# EAGLE board zeta2rework_lw_v32_rework (EAGLE 9.3.1)
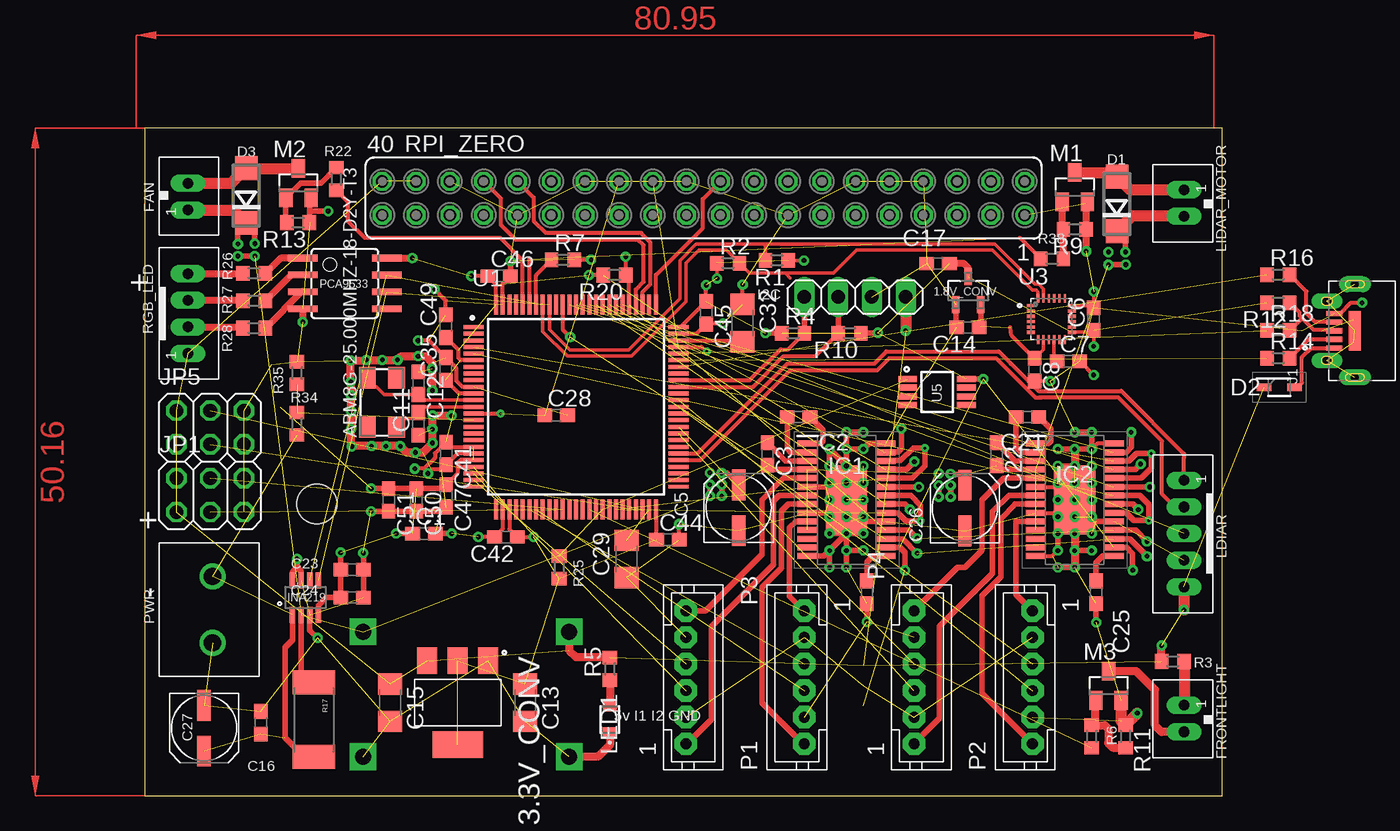
[diagram p0: board, top side]
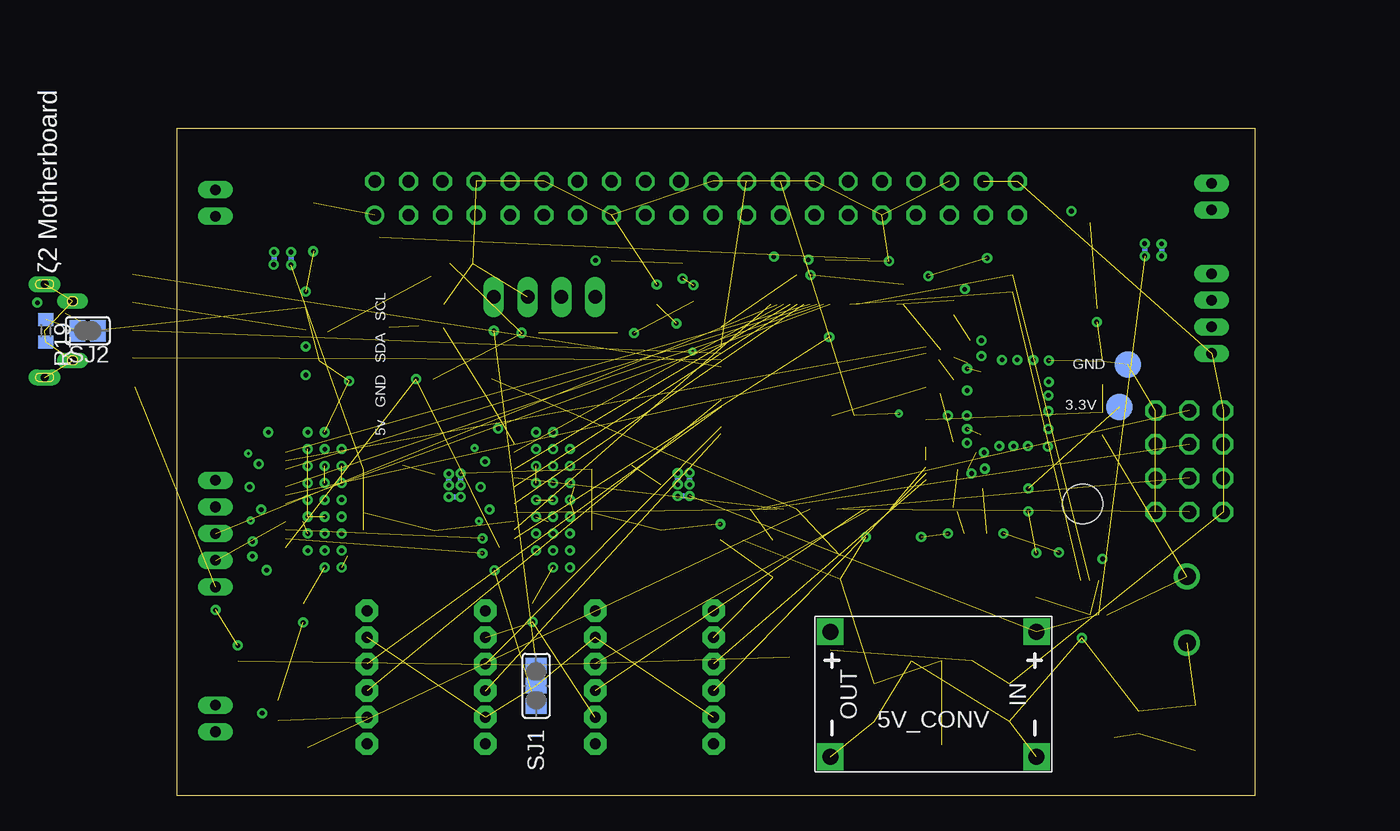
[diagram p1: board, bottom side, seen from below]

Size 80.95 x 50.16 mm. Coordinates in mm from the lower left corner, seen from the top.
Outline: 0,0 80.95,0 80.95,50.16 0,50.16 0,0
Copper layers (1+2*15+16): Top 0.035mm / dielectric 1.5mm / Route2 0.035mm / dielectric 0.15mm / Route15 0.035mm / dielectric 0.2mm / Bottom 0.035mm
Design rules "default *": minimum track width 6mil, minimum drill 0.35mm, track to track 6mil, track to pad 6mil, pad to pad 6mil, via to via 6mil, smd to smd 6mil, copper to edge 40mil, drill to drill 6mil, minimum pad ring 10mil, minimum via ring 8mil, stop-mask expansion 4mil, vias tented up to drill 0mil, thermal gap 10mil
Net classes: 0 default: clearance 0.203 mm
Holes 3 mm at 12.93,21.92

## Footprints (pad centres in the part's own frame; a part is rotated, then mirrored left to right if it is on the bottom)
SOT95P237X112-3N = smd 0.559 x 1.27: 1 -0.94,-1.041; 2 0.94,-1.041; 3 0,1.041
TP20R = smd 2 x 2: TP 0,0
SOT230P700X175-4N = smd 2 x 1.5: 1 -3.15,2.3; 2 -3.15,0; 3 -3.15,-2.3 | smd 2 x 3.8: 4 3.15,0
DC-DC-STEP-DOWN-MP2307 = drill 1.2 pad 2 square: IN+ -7.747,-4.699; IN- -7.747,4.699; OUT+ 7.747,-4.699; OUT- 7.747,4.699
5.0X3.2_KX-9A = smd 1.6 x 1.25: 1 -1.85,-1.1; 2 1.85,-1.1; 3 1.85,1.1; 4 -1.85,1.1
C0603 = smd 1.1 x 1: 1 -0.85,0; 2 0.85,0
UD-5X5,8_NICHICON = smd 2.3 x 1: + 1.725,0; - -1.7,0
C1206 = smd 1.6 x 1.8: 1 -1.4,0; 2 1.4,0
DO214AC = smd 1.8 x 1.7: A 2.05,0; C -2.05,0
SOD2513X117N = smd 1.085 x 0.55: 1 -1.14,0; 2 1.14,0
JST_B2B-PH_HEADER = drill 0.8 long: P1 1.075,0.048; P2 -0.925,0.048
1X04 = drill 1.016 long: 1 -3.81,0; 2 -1.27,0; 3 1.27,0; 4 3.81,0
SOP65P640X120-29N = smd 1.475 x 0.45: 1 -2.938,4.225; 2 -2.938,3.575; 3 -2.938,2.925; 4 -2.938,2.275; 5 -2.938,1.625; 6 -2.938,0.975; 7 -2.938,0.325; 8 -2.938,-0.325; 9 -2.938,-0.975; 10 -2.938,-1.625; 11 -2.938,-2.275; 12 -2.938,-2.925; 13 -2.938,-3.575; 14 -2.938,-4.225; 15 2.938,-4.225; 16 2.938,-3.575; 17 2.938,-2.925; 18 2.938,-2.275; 19 2.938,-1.625; 20 2.938,-0.975; 21 2.938,-0.325; 22 2.938,0.325; 23 2.938,0.975; 24 2.938,1.625; 25 2.938,2.275; 26 2.938,2.925; 27 2.938,3.575; 28 2.938,4.225 | smd 3.1 x 5.18: 29 0,0
SOT23-8 = smd 0.4 x 1.2: 1 -0.975,-1.3; 2 -0.325,-1.3; 3 0.325,-1.3; 4 0.975,-1.3; 5 0.975,1.3; 6 0.325,1.3; 7 -0.325,1.3; 8 -0.975,1.3
CUI_UJ2-MIBH2-4-SMT-TR = smd 0.4 x 1.2: 1 -1.3,2.1; 2 -0.65,2.1; 3 0,2.1; 4 0.65,2.1; 5 1.3,2.1 | drill 0.6 pad 1.2 long: SH1 -3.5,0.55; SH4 3.5,0.55 | drill 0.65 pad 1.1 long: SH2 -2.225,2.65; SH3 2.225,2.65 | smd 3 x 0.9: SH5 0,0.55
2X03 = drill 1.016 octagon: 1 -2.54,-1.27; 2 -2.54,1.27; 3 0,-1.27; 4 0,1.27; 5 2.54,-1.27; 6 2.54,1.27
JST_B5B-PH_HEADER = drill 0.8 long: P1 4,0.048; P2 2,0.048; P3 0,0.048; P4 -2,0.048; P5 -4,0.048
LTM673-N1R2-25 = smd 0.8 x 1: 1 -1,0; 2 1,0
SOT23 = smd 1 x 1.4: 1 -0.95,-1.1; 2 0.95,-1.1; 3 0,1.1
JST-PH6 = drill 0.813 pad 1.676 octagon: 1 5,0; 2 3,0; 3 1,0; 4 -1,0; 5 -3,0; 6 -5,0
SOIC8 = smd 0.5 x 2.2: 1 -1.905,-3.154; 2 -0.645,-3.154; 3 0.625,-3.154; 4 1.895,-3.154; 5 1.905,3.154; 6 0.635,3.154; 7 -0.635,3.154; 8 -1.905,3.154
691137710002 = drill 1.3: 1 -2.5,0; 2 2.5,0
R0603 = smd 1 x 1.1: 1 -0.85,0; 2 0.85,0
2512 = smd 1.8 x 3.2: 1 -2.8,0; 2 2.8,0
JST_B4B-PH_HEADER = drill 0.8 long: P1 2.98,0.048; P2 0.98,0.048; P3 -1.02,0.048; P4 -3.02,0.048
FE20-2 = drill 0.914: 1 -24.13,1.27 | drill 0.914 octagon: 2 -24.13,-1.27; 3 -21.59,1.27; 4 -21.59,-1.27; 5 -19.05,1.27; 6 -19.05,-1.27; 7 -16.51,1.27; 8 -16.51,-1.27; 9 -13.97,1.27; 10 -13.97,-1.27; 11 -11.43,1.27; 12 -11.43,-1.27; 13 -8.89,1.27; 14 -8.89,-1.27; 15 -6.35,1.27; 16 -6.35,-1.27; 17 -3.81,1.27; 18 -3.81,-1.27; 19 -1.27,1.27; 20 -1.27,-1.27; 21 1.27,1.27; 22 1.27,-1.27; 23 3.81,1.27; 24 3.81,-1.27; 25 6.35,1.27; 26 6.35,-1.27; 27 8.89,1.27; 28 8.89,-1.27; 29 11.43,1.27; 30 11.43,-1.27; 31 13.97,1.27; 32 13.97,-1.27; 33 16.51,1.27; 34 16.51,-1.27; 35 19.05,1.27; 36 19.05,-1.27; 37 21.59,1.27; 38 21.59,-1.27; 39 24.13,1.27; 40 24.13,-1.27
SJ_2 = smd 1.168 x 1.6: 1 -1.524,0; 2 0,0; 3 1.524,0
SJ = smd 1.168 x 1.6: 1 -0.762,0; 2 0.762,0
QFP50P1600X1600X160-100N = smd 1.5 x 0.3: 1 -7.7,6; 2 -7.7,5.5; 3 -7.7,5; 4 -7.7,4.5; 5 -7.7,4; 6 -7.7,3.5; 7 -7.7,3; 8 -7.7,2.5; 9 -7.7,2; 10 -7.7,1.5; 11 -7.7,1; 12 -7.7,0.5; 13 -7.7,0; 14 -7.7,-0.5; 15 -7.7,-1; 16 -7.7,-1.5; 17 -7.7,-2; 18 -7.7,-2.5; 19 -7.7,-3; 20 -7.7,-3.5; 21 -7.7,-4; 22 -7.7,-4.5; 23 -7.7,-5; 24 -7.7,-5.5; 25 -7.7,-6; 51 7.7,-6; 52 7.7,-5.5; 53 7.7,-5; 54 7.7,-4.5; 55 7.7,-4; 56 7.7,-3.5; 57 7.7,-3; 58 7.7,-2.5; 59 7.7,-2; 60 7.7,-1.5; 61 7.7,-1; 62 7.7,-0.5; 63 7.7,0; 64 7.7,0.5; 65 7.7,1; 66 7.7,1.5; 67 7.7,2; 68 7.7,2.5; 69 7.7,3; 70 7.7,3.5; 71 7.7,4; 72 7.7,4.5; 73 7.7,5; 74 7.7,5.5; 75 7.7,6 | smd 0.3 x 1.5: 26 -6,-7.7; 27 -5.5,-7.7; 28 -5,-7.7; 29 -4.5,-7.7; 30 -4,-7.7; 31 -3.5,-7.7; 32 -3,-7.7; 33 -2.5,-7.7; 34 -2,-7.7; 35 -1.5,-7.7; 36 -1,-7.7; 37 -0.5,-7.7; 38 0,-7.7; 39 0.5,-7.7; 40 1,-7.7; 41 1.5,-7.7; 42 2,-7.7; 43 2.5,-7.7; 44 3,-7.7; 45 3.5,-7.7; 46 4,-7.7; 47 4.5,-7.7; 48 5,-7.7; 49 5.5,-7.7; 50 6,-7.7; 76 6,7.7; 77 5.5,7.7; 78 5,7.7; 79 4.5,7.7; 80 4,7.7; 81 3.5,7.7; 82 3,7.7; 83 2.5,7.7; 84 2,7.7; 85 1.5,7.7; 86 1,7.7; 87 0.5,7.7; 88 0,7.7; 89 -0.5,7.7; 90 -1,7.7; 91 -1.5,7.7; 92 -2,7.7; 93 -2.5,7.7; 94 -3,7.7; 95 -3.5,7.7; 96 -4,7.7; 97 -4.5,7.7; 98 -5,7.7; 99 -5.5,7.7; 100 -6,7.7
QFN40P300X300X105-25N = smd 0.64 x 0.22: 1 -1.545,1; 2 -1.545,0.6; 3 -1.545,0.2; 4 -1.545,-0.2; 5 -1.545,-0.6; 6 -1.545,-1; 13 1.545,-1; 14 1.545,-0.6; 15 1.545,-0.2; 16 1.545,0.2; 17 1.545,0.6; 18 1.545,1 | smd 0.22 x 0.64: 7 -1,-1.545; 8 -0.6,-1.545; 9 -0.2,-1.545; 10 0.2,-1.545; 11 0.6,-1.545; 12 1,-1.545; 19 1,1.545; 20 0.6,1.545; 21 0.2,1.545; 22 -0.2,1.545; 23 -0.6,1.545; 24 -1,1.545
SOP65P490X95-8N = smd 1.4 x 0.45: 1 -2.2,0.975; 2 -2.2,0.325; 3 -2.2,-0.325; 4 -2.2,-0.975; 5 2.2,-0.975; 6 2.2,-0.325; 7 2.2,0.325; 8 2.2,0.975

## Placement (x,y rotation side)
1.8V_CONV  MCP1700T-1802E/TT  [SOT95P237X112-3N]  61.85,37.95 0 top
3.3V  TPSQTP20R  [TP20R]  10.16,29.21 0 bottom
3.3V_CONV  NCP1117LPST33T3G  [SOT230P700X175-4N]  23.5,6.99 270 top
5V_CONV  DC-DC-STEP-DOWN-MP2307  [DC-DC-STEP-DOWN-MP2307]  24.13,7.62 180 bottom
ABM8G-25.000MHZ-18-D2Y-T3  25mhz  [5.0X3.2_KX-9A]  17.81,29.54 90 top
C1  4.7µf  [C0603]  20.95,19.69 0 top
C2  0.01µf 100v  [C0603]  49.11,28.45 180 top
C3  0.1µF 16v  [C0603]  46.76,25.67 270 top
C4  0.47µF 6.3v  [C0603]  54.23,15.28 270 top
C5  47µF  [UD-5X5,8_NICHICON]  44.6,21.62 90 top
C6  0.1nF  [C0603]  71.27,35.81 90 top
C7  0.1nF  [C0603]  69.37,32.64 0 top
C8  0.1nF  [C0603]  66.83,32 270 top
C11  Xpf  [C0603]  20.55,27.94 90 top
C12  Xpf  [C0603]  20.55,30.99 270 top
C13  10µF  [C1206]  28.57,6.99 270 top
C14  1µF  [C0603]  61.82,35.18 180 top
C15  10µF  [C1206]  18.41,6.99 270 top
C16  0.1µF  [C0603]  8.71,5.49 90 top
C17  1µF  [C0603]  59.59,39.98 180 top
C21  0.01µf 100v  [C0603]  66.29,28.45 180 top
C22  0.1µF 16v  [C0603]  63.98,25.65 270 top
C23  100nf  [C0603]  15.57,16.97 0 top
C24  0.1µF  [C0603]  15.57,14.88 0 top
C25  0.47µF 6.3v  [C0603]  71.45,15.28 270 top
C26  47µF  [UD-5X5,8_NICHICON]  61.59,21.59 90 top
C27  100µF  [UD-5X5,8_NICHICON]  4.45,5.08 270 top
C28  100nF  [C0603]  30.9,28.58 0 top
C29  2.2µf Low ESR < 2ohm  [C1206]  36.2,17.78 90 top
C32  2.2µf Low ESR < 2ohm  [C1206]  44.91,35.51 270 top
C35  100nF  [C0603]  22.61,32.07 90 top
C41  100nF  [C0603]  22.63,25.7 270 top
C42  100nF  [C0603]  27.11,19.43 180 top
C44  100nF  [C0603]  39.28,19.23 0 top
C45  100nF  [C0603]  42.16,36.28 270 top
C46  100nF  [C0603]  26.61,39.04 0 top
C47  100nF  [C0603]  22.63,22.52 270 top
C49  100nF  [C0603]  22.61,35.27 90 top
C50  100nF  [C0603]  20.4,22.21 270 top
C51  1µf  [C0603]  18.31,22.21 270 top
D1  1N4004 SMD  [DO214AC]  73.03,44.45 90 top
D2  BAT60JFILM  [SOD2513X117N]  85.22,30.68 0 top  (outside the outline)
D3  1N4004 SMD  [DO214AC]  7.62,45.09 90 top
FAN  JST-PH_2-PIN_HEADER  [JST_B2B-PH_HEADER]  3.17,45.09 270 top
FRONTLIGHT  JST-PH_2-PIN_HEADER  [JST_B2B-PH_HEADER]  78.11,5.71 90 top
GND  TPSQTP20R  [TP20R]  9.53,32.38 0 bottom
I2C  [1X04]  53.34,37.47 0 top
IC1  DRV8844PWPR  [SOP65P640X120-29N]  52.7,22.23 0 top
IC2  DRV8844PWPR  [SOP65P640X120-29N]  69.85,22.23 0 top
INA219  INA219  [SOT23-8]  12.06,14.88 0 top
J1  UJ2-MIBH2-4-SMT-TR  [CUI_UJ2-MIBH2-4-SMT-TR]  91.44,34.92 90 top  (outside the outline)
JP1  [2X03]  4.9,22.58 0 top
JP5  [2X03]  4.9,27.66 0 top
LDIAR  JST-PH_5-PIN_HEADER  [JST_B5B-PH_HEADER]  78.11,19.69 90 top
LED1  LT M673  [LTM673-N1R2-25]  34.92,5.71 90 top
LIDAR_MOTOR  JST-PH_2-PIN_HEADER  [JST_B2B-PH_HEADER]  78.11,44.45 90 top
M1  IRLML2502  [SOT23]  69.85,45.72 0 top
M2  IRLML2502  [SOT23]  11.53,46.02 0 top
M3  IRLML2502  [SOT23]  72.39,8.25 0 top
P1  [JST-PH6]  49.53,8.89 90 top
P2  [JST-PH6]  66.67,8.89 90 top
P3  [JST-PH6]  40.64,8.89 270 top
P4  [JST-PH6]  57.78,8.89 270 top
PCA9533  PCA9533  [SOIC8]  15.01,38.48 270 top
PWR  691137710002  [691137710002]  5.08,13.97 270 top
R1  10k  [R0603]  47.47,40.21 180 top
R2  10k  [R0603]  43.81,40.01 0 top
R3  0R  [R0603]  77.22,10.08 0 top
R4  10k  [R0603]  48.69,34.75 0 top
R5  220R  [R0603]  34.92,9.53 90 top
R6  22R  [R0603]  71.12,4.44 90 top
R7  10k  [R0603]  31.39,40.26 0 top
R9  100k  [R0603]  69.85,42.55 180 top
R10  10k  [R0603]  52.93,34.75 180 top
R11  100k  [R0603]  73.66,4.44 270 top
R12  1k5  [R0603]  85.14,37.03 180 top  (outside the outline)
R13  100k  [R0603]  11.51,43.05 180 top
R14  22r  [R0603]  85.14,32.87 0 top  (outside the outline)
R16  100k  [R0603]  85.14,39.14 0 top  (outside the outline)
R17  0.1/1% (PT2512FK-070R1L)  [2512]  12.7,5.71 270 top
R18  22r  [R0603]  85.14,34.95 0 top  (outside the outline)
R19  100r  [R0603]  90.81,34.92 270 bottom  (outside the outline)
R20  100k  [R0603]  35.28,39.12 180 top
R22  22R  [R0603]  14.38,46.33 90 top
R25  4k7  [R0603]  31.11,17.14 270 top
R26  220R  [R0603]  8.2,39.24 180 top
R27  220R  [R0603]  8.2,37.19 180 top
R28  220R  [R0603]  8.2,35.13 180 top
R34  100k  [R0603]  11.43,27.94 270 top
R35  69k  [R0603]  11.43,31.75 270 top
R38  22R  [R0603]  68.15,40.34 0 top
RGB_LED  JST-PH_4-PIN_HEADER  [JST_B4B-PH_HEADER]  3.17,36.2 270 top
RPI_ZERO  [FE20-2]  41.96,44.88 180 top
SJ1  [SJ_2]  53.98,8.25 270 bottom
SJ2  [SJ]  87.66,34.92 180 bottom  (outside the outline)
U1  STM32F427VI  [QFP50P1600X1600X160-100N]  32.38,29.21 0 top
U3  ICM-20948  [QFN40P300X300X105-25N]  68.1,35.81 0 top
U5  DS18B20U+  [SOP65P490X95-8N]  59.51,30.33 0 top

## Library data of the parts
1.8V_CONV = MCP1700T-2102E_TT; AVAILABILITY: Unavailable; DESCRIPTION: 250mA CMOS LDO, Isupply 1uA and 2% VoutAccuracy; MF: Microchip; MP: MCP1700T-2102E/TT; PACKAGE: SOT-23 Microchip; PRICE: None
3.3V GND = testpad
3.3V_CONV = NCP1117LPST33T3G; AVAILABILITY: Unavailable; DESCRIPTION: Linear Voltage Regulator, Positive, LDO, 1.0 A _Fixed and Adjustable_ Vout: 3.3 V; MF: ON Semiconductor; MP: NCP1117LPST33T3G; PACKAGE: SOT-223 ON Semiconductor; PRICE: None
5V_CONV = diy-modules
ABM8G-25.000MHZ-18-D2Y-T3 = crystal-geyer_V1_0
C1-C8 C11-C17 C21-C29 C32 C35 C41 C42 C44-C47 C49-C51 = rcl; SPICEPREFIX: C
D1 D3 = diode
D2 = BAT60JFILM; ALLIED_NUMBER: 70389806; ALLIED_PRICE-STOCK: http://www.alliedelec.com/stmicroelectronics-bat60jfilm/70389806/; DESCRIPTION: BAT60JFILM, Schottky Diode, 3A max, 10V, 2-Pin, SOD-323; HEIGHT: 1.17mm; MANUFACTURER_NAME: STMicroelectronics; MANUFACTURER_PART_NUMBER: BAT60JFILM; MOUSER_PART_NUMBER: 511-BAT60JFILM; MOUSER_PRICE-STOCK: https://www.mouser.com/Search/Refine.aspx?Keyword=511-BAT60JFILM; RS_PART_NUMBER: 1458781; RS_PRICE-STOCK: http://uk.rs-online.com/web/p/products/1458781
FAN FRONTLIGHT LDIAR LIDAR_MOTOR RGB_LED = srg
I2C JP1 JP5 = pinhead
IC1 IC2 = DRV8844PWPR; DESCRIPTION: 5A Brushed DC motor or Quad 1.75A Solenoid/Relay Driver with +/-30V split supply support (PWM Ctrl); HEIGHT: 1.2mm; MANUFACTURER_NAME: Texas Instruments; MANUFACTURER_PART_NUMBER: DRV8844PWPR; MOUSER_PART_NUMBER: 595-DRV8844PWPR; MOUSER_PRICE-STOCK: https://www.mouser.com/Search/Refine.aspx?Keyword=595-DRV8844PWPR
INA219 = INA219; AVAILABILITY: Unavailable; DESCRIPTION: the ina219 is a high-side current shunt and power monitor with an i2c interface. the ina219 monitors both shunt drop ...; MF: Texas Instruments; MP: INA219; PACKAGE: None; PRICE: None
J1 = UJ2-MIBH2-4-SMT-TR; AVAILABILITY: Unavailable; CUI_PURCHASE_URL: https://www.cui.com/product/interconnect/usb-connectors/micro-b/uj2-mibh2-4-smt?utm_source=snapeda.com&utm_medium=referral&utm_campaign=snapedaBOM; DESCRIPTION: Micro B Type 5 Pin Horizontal 30 µin Plating SMT USB Jack 2.0; MF: CUI Inc.; MP: UJ2-MIBH2-4-SMT-TR; PACKAGE: None; PRICE: None
LED1 = LT_M673-N1R2-25; DESCRIPTION: Osram Opto LT M673-N1R2-25, Mini TOPLED Series Green LED, 529 nm,, Rectangle Lens SMD Package; HEIGHT: mm; MANUFACTURER_NAME: OSRAM Opto Semiconductors; MANUFACTURER_PART_NUMBER: LT M673-N1R2-25; MOUSER_PART_NUMBER: 720-LTM673N1R225Z; MOUSER_PRICE-STOCK: https://www.mouser.com/Search/Refine.aspx?Keyword=720-LTM673N1R225Z; RS_PART_NUMBER: 9133231; RS_PRICE-STOCK: http://uk.rs-online.com/web/p/products/9133231
M1-M3 = IRLML2502TRPBF; AVAILABILITY: Unavailable; DESCRIPTION: Single N-Channel 20 V 0.08 Ohm 12 nC 1.25 W Silicon SMT Mosfet - SOT-23; MF: Infineon; MP: IRLML2502TRPBF; PACKAGE: SOT-23-3 Infineon; PRICE: None
P1-P4 = jst-ph
PCA9533 = adam - ics
PWR = term block; AVAILABILITY: Unavailable; DESCRIPTION: Term Block 2pos Side Entry 5mm; MF: Wurth Electronics; MP: 691137710002; PACKAGE: None; PRICE: None
R1-R7 R9-R14 R16 R18-R20 R22 R25-R28 R34 R35 R38 = rcl; SPICEPREFIX: R
R17 = microbuilder
RPI_ZERO = con-lsta; OC_FARNELL: unknown; OC_NEWARK: unknown
SJ1 SJ2 = jumper
U1 = STM32F427VGT7; AVAILABILITY: Unavailable; DESCRIPTION: Ic Mcu 32bit 1mb Flash 100lqfp; MF: STMicroelectronics; MP: STM32F427VGT7; PACKAGE: LQFP-100 STMicroelectronics; PRICE: None
U3 = ICM-20948; AVAILABILITY: Unavailable; DESCRIPTION: 9 Axis=3 Axis Gyro+3 Axis Accel+Compass. Pin For Pin With m; MF: TDK InvenSense; MP: ICM-20948; PACKAGE: QFN-24 InvenSense; PRICE: None
U5 = DS18B20U_; AVAILABILITY: Unavailable; DESCRIPTION: Date Code: 1043+; RoHS Compliant: Yes;; MF: Maxim; MP: DS18B20U+; PACKAGE: TSSOP-8 Chip Coolers; PRICE: None

## Nets
+1.8V: 1.8V_CONV.2 C8.1 C14.1 U3.8
+3V3: 1.8V_CONV.3 3.3V.TP 3.3V_CONV.2 3.3V_CONV.4 C1.1 C6.1 C13.1 C17.1 C23.1 C24.1 C35.1 C41.1 C42.1 C44.1 C45.1 C46.1 C47.1 C49.1 C50.1 C51.1 IC1.16 IC2.16 INA219.4 PCA9533.8 R1.1 R2.1 R4.1 R10.1 R12.2 R20.2 R25.2 SJ1.3 U1.6 U1.11 U1.19 U1.21 U1.22 U1.28 U1.50 U1.75 U1.100 U3.13 U5.8
+5V: 3.3V_CONV.3 5V_CONV.OUT+ C15.1 D2.1 I2C.4 JP1.1 JP1.2 JP5.1 JP5.2 LDIAR.P5 R3.1 R5.2 RGB_LED.P1 RPI_ZERO.38 RPI_ZERO.40 SJ1.1
+8V: 5V_CONV.IN+ C3.2 C5.+ C22.2 C26.+ D1.C D3.C FAN.P1 IC1.4 IC1.11 IC2.4 IC2.11 INA219.2 LIDAR_MOTOR.P2 R17.1
BAT_LVL: R34.1 R35.2 U1.15
DEC_LB_1: P1.3 U1.31
DEC_LB_2: P1.4 U1.32
DEC_LF_1: P3.3 U1.23
DEC_LF_2: P3.4 U1.24
DEC_RB_1: P2.3 U1.63
DEC_RB_2: P2.4 U1.64
DEC_RF_1: P4.3 U1.59
DEC_RF_2: P4.4 U1.60
GND: 1.8V_CONV.1 3.3V_CONV.1 5V_CONV.IN- 5V_CONV.OUT- C1.2 C4.2 C5.- C6.2 C7.2 C8.2 C11.1 C12.1 C13.2 C14.2 C15.2 C16.2 C17.2 C23.2 C24.2 C25.2 C26.- C27.- C28.2 C29.1 C32.1 C35.2 C41.2 C42.2 C44.2 C45.2 C46.2 C47.2 C49.2 C50.2 C51.2 GND.TP I2C.3 IC1.6 IC1.9 IC1.14 IC1.19 IC1.28 IC1.29 IC2.6 IC2.9 IC2.14 IC2.19 IC2.28 IC2.29 INA219.3 INA219.7 INA219.8 J1.5 JP1.5 JP1.6 JP5.5 JP5.6 LDIAR.P4 LED1.1 M1.2 M2.2 M3.2 P1.5 P2.5 P3.5 P4.5 PCA9533.4 PWR.2 R7.2 R9.1 R11.1 R13.1 R35.1 RPI_ZERO.1 RPI_ZERO.8 RPI_ZERO.12 RPI_ZERO.15 RPI_ZERO.22 RPI_ZERO.28 RPI_ZERO.31 RPI_ZERO.36 SJ2.1 U1.10 U1.20 U1.27 U1.74 U1.99 U3.18 U5.4
I2C1_SCL: INA219.5 PCA9533.6 R1.2 U1.92 U3.23
I2C1_SDA: INA219.6 PCA9533.7 R2.2 U1.93 U3.24
I2C3_SCL: I2C.1 R4.2 U1.67
I2C3_SDA: I2C.2 R10.2 U1.66
LIDAR_POS_INT: LDIAR.P3 U1.81
M_LB_IN1: IC1.23 U1.84
M_LB_IN2: IC1.21 U1.85
M_LF_IN1: IC1.27 U1.82
M_LF_IN2: IC1.25 U1.83
M_PWM_LB: IC1.20 IC1.22 U1.45
M_PWM_LF: IC1.24 IC1.26 U1.44
M_PWM_RB: IC2.20 IC2.22 U1.5
M_PWM_RF: IC2.24 IC2.26 U1.4
M_RB_IN1: IC2.23 U1.88
M_RB_IN2: IC2.21 U1.89
M_RF_IN1: IC2.27 U1.86
M_RF_IN2: IC2.25 U1.87
M_SLEEP: IC1.17 IC2.17 U1.90
N$1: C21.2 IC2.2
N$2: C21.1 IC2.1
N$3: C22.1 IC2.3
N$4: IC2.10 P2.1
N$5: J1.3 R12.1 R18.2
N$6: FRONTLIGHT.P1 R3.2
N$7: LED1.2 R5.1
N$8: C7.1 U3.10
N$9: FRONTLIGHT.P2 M3.3
N$10: M3.1 R6.2 R11.2
N$11: IC2.5 P4.6
N$12: IC2.7 P4.1
N$13: ABM8G-25.000MHZ-18-D2Y-T3.1 C11.2 U1.13
N$14: IC1.5 P3.6
N$15: D2.2 J1.1
N$16: R7.1 U1.94
N$17: J1.4 R16.2
N$18: C2.2 IC1.2
N$19: IC2.8 P2.6
N$20: C2.1 IC1.1
N$21: C3.1 IC1.3
N$22: PCA9533.1 R26.1
N$23: PCA9533.2 R27.1
N$24: PCA9533.3 R28.1
N$25: R19.1 SJ2.2
N$26: C25.1 IC2.15
N$27: IC1.7 P3.1
N$28: IC1.8 P1.6
N$29: C4.1 IC1.15
N$30: IC1.10 P1.1
N$31: R26.2 RGB_LED.P4
N$32: P1.2 P2.2 P3.2 P4.2 SJ1.2
N$33: R27.2 RGB_LED.P3
N$34: J1.2 R14.2
N$35: R28.2 RGB_LED.P2
N$36: C29.2 U1.49
N$37: M2.1 R13.2 R22.2
N$38: M1.1 R9.2 R38.2
N$39: D1.A LIDAR_MOTOR.P1 M1.3
N$40: J1.SH1 J1.SH2 J1.SH3 J1.SH4 J1.SH5 R19.2
N$44: ABM8G-25.000MHZ-18-D2Y-T3.3 C12.2 U1.12
N$45: C32.2 U1.73
N$55: D3.A FAN.P2 M2.3
NFAULT: IC1.18 IC2.18 R20.1 U1.80
NRST: C28.1 RPI_ZERO.26 U1.14
PWM1: JP5.3 U1.47
PWM2: JP5.4 U1.48
PWM3: JP1.3 U1.35
PWM4: JP1.4 U1.36
PWM_FAN: R22.1 U1.96
PWM_LIDAR: R38.1 U1.95
PWM_LIGHT: R6.1 U1.40
SWCLK: RPI_ZERO.20 U1.76
SWDIO: RPI_ZERO.24 U1.72
TEMPERATURE: R25.1 U1.42 U5.1
UART2_RX: U1.26
UART2_TX: U1.25
UART3_RX: LDIAR.P1 U1.56
UART3_TX: LDIAR.P2 U1.55
UART4_RX: RPI_ZERO.34 U1.79
UART4_TX: RPI_ZERO.32 U1.78
USB_OTG_DM: R14.1 U1.70
USB_OTG_DP: R18.1 U1.71
USB_OTG_ID: R16.1 U1.69
USB_OTG_VBUS: U1.68
V+: C16.1 C27.+ INA219.1 PWR.1 R17.2 R34.2

## Tracks (layer width: path | path; a pad name or v marks a point on that pad's centre or on a via)
+1.8V  (1 unrouted)
  Top 0.254: C8.1 67.5,33.52 U3.8
  Top 0.305: C8.1 65.1,34.58 65,35.17
  Top 0.406: 1.8V_CONV.2 62.79,35.29 C14.1
+3V3  (via drill 0.35)  (27 unrouted)
  Top 0.254: U3.13 71.12,34.81 C6.1 v71.27,33.76 | R1.1 v49.51,40.21 | v42.98,38.86 42.97,38.87 R2.1
  Top 0.305: U1.28 27.39,20.01 C42.1 v29.21,19.43 | U1.50 38.38,19.41 C44.1 | U1.75 40.24,35.21 C45.1 v42.16,38.35 | U1.100 26.39,38.41 C46.1 v24.51,39.04 | U1.11 23.61,30.21 C35.1 | C41.1 22.54,26.55 | C41.1 22.98,26.21 U1.19 | U1.21 23.69,25.21 23.52,25.04 23.52,24.87 | U1.22 23.68,24.71 23.52,24.87 | 22.25,34.06 C49.1 23.55,33.48 23.55,32.89 23.73,32.71 U1.6 | R20.2 v33.35,39.12 | 23.52,24.87 23.52,24.25 C47.1 | C41.1 21.79,25.72 21.79,25.38 21.38,24.96 21.36,24.96 20.97,24.56 v20.27,24.56
  Top 0.406: 22.57,23.43 C47.1 22.33,23.06 C50.1 C51.1 v16.99,23.06 | C1.1 v18.87,19.69 | INA219.4 13.04,14.31 13.61,14.88 C24.1 C23.1 14.72,18.25 v14.71,18.26 | U5.8 v62.98,31.3 v62.99,31.29 | R10.1 55.04,34.75 v55.07,34.77 | R4.1 v46.61,34.75 | IC2.16 73.75,18.65 74.19,18.21 74.19,16.97 v74.22,16.94 | IC1.16 56.71,18.65 57.1,18.26 v57.1,16.92
  Top 0.508: PCA9533.8 v20.09,40.39 | 1.8V_CONV.3 61.85,39.65 61.52,39.98 C17.1
+5V  (via drill 0.35)  (14 unrouted)
  Top 0.61: 5V_CONV.OUT+ 31.88,10.92 32.38,10.41 34.89,10.41 R5.2 | R3.1 76.37,11.27 v76.38,11.28
  Top 0.813: I2C.4 v57.15,34.92 | LDIAR.P5 v78.06,13.95 v78.05,13.95
+8V  (via drill 0.35)  (9 unrouted)
  Top 0.406: IC1.4 47.08,24.5 C3.2 | INA219.2 11.74,9.06 12.29,8.52 R17.1 | IC2.4 64.29,24.5 C22.2 | C5.+ 43.71,24.23 v43.33,24.23 | v43.33,23.37 v43.33,22.5 | v42.44,22.5 v42.44,23.37 | v60.53,23.32 v60.53,22.45 | v59.64,22.45 v59.64,23.32 | v60.53,24.18 60.58,24.13 61.59,24.13 C26.+ | v6.99,41.45 6.99,42.4 D3.C 8.26,42.4 v8.26,41.48 | D1.C 73.66,41.77 v73.66,40.84 | v73.69,39.9 72.42,39.9 v72.39,39.88 | v6.99,40.54 v8.26,40.54
  Top 0.813: FAN.P1 6.64,44.01 D3.C | LIDAR_MOTOR.P2 74.15,43.52 D1.C
  Bottom 0.406: v43.33,24.23 v43.33,23.37 | v43.33,22.5 v42.44,22.5 | v42.44,23.37 v42.44,24.26 | v60.53,24.18 v60.53,23.32 | v60.53,22.45 v59.64,22.45 | v59.64,23.32 v59.64,24.21 | v73.66,40.84 73.66,39.93 v73.69,39.9 | v72.39,39.88 v72.39,40.84 | v6.99,41.45 v6.99,40.54 | v8.26,40.54 v8.26,41.48
BAT_LVL  (2 unrouted)
DEC_LB_1  (1 unrouted)
DEC_LB_2  (1 unrouted)
DEC_LF_1  (1 unrouted)
DEC_LF_2  (1 unrouted)
DEC_RB_1  (1 unrouted)
DEC_RB_2  (1 unrouted)
DEC_RF_1  (1 unrouted)
DEC_RF_2  (1 unrouted)
GND  (via drill 0.35)  (78 unrouted)
  Top 0.254: U3.18 71.12,36.81 C6.2 v71.27,37.87 | C8.2 68.01,31.15 v68.02,31.14
  Top 0.305: U1.27 26.89,20.05 C42.2 v25.04,19.43 | U1.74 41.44,34.71 C45.2 42.22,35.48 v43.43,35.48 | U1.99 26.89,38.47 C46.2 | U1.10 23.85,30.71 23.41,31.15 23.41,32.11 C35.2 21.34,34.19 v20.52,34.19 | 22.65,24.87 C41.2 | C41.2 22.28,24.5 21.55,24.5 v21.26,24.21 | R7.2 v33.53,40.26 | U1.20 23.49,25.71 C41.2 | C49.2 22.61,37.21 v21.77,38.05 | C44.2 v40.13,20.4 | C32.1 v44.91,38.41 | J1.5 89.79,36.23 90.6,37.03 v91.44,37.03 | C7.2 v71.26,31.6 v71.27,31.6 | IC2.28 71.53,26.45 v71.12,26.04 | IC2.6 68.28,23.2 v68.58,23.5 | IC2.9 68.28,21.25 v68.58,20.96 | IC2.14 68.17,18 v68.58,18.41
  Top 0.406: IC1.19 53.06,20.6 v52.7,20.96 | v52.7,26.04 v53.98,26.04 54.39,26.45 IC1.28 | v53.98,27.3 v52.7,27.3 v52.7,26.04 | v53.98,18.41 v52.7,18.41 | v53.98,19.69 v52.7,19.69 | v52.7,19.69 v51.44,19.69 | IC1.29 v51.44,22.23 | v52.7,26.04 v52.7,24.77 | v52.7,18.41 v52.7,19.69 | v52.7,17.14 v52.7,18.41 | IC1.6 51.14,23.2 v51.44,23.5 | IC1.9 51.14,21.25 v51.44,20.96 | IC1.14 51.02,18 v51.44,18.41 | 1.8V_CONV.1 60.91,35.24 C14.2 | v69.85,24.77 v68.58,24.77 | v71.12,18.41 v69.85,18.41 | v69.85,17.14 v68.58,17.14 | C47.2 22.33,21.36 C50.2 C51.2 v16.99,21.36 | C1.2 v23.04,19.69 | M2.2 12.28,44.72 12.36,44.65 12.36,43.81 | R13.1 12.36,43.81 | v13.77,43.92 12.46,43.92 12.36,43.81 | INA219.3 12.39,12.43 v12.98,11.84 | INA219.7 11.74,16.84 11.43,17.14 | 11.43,17.14 11.09,16.8 INA219.8 | 11.43,17.14 v11.43,17.78 | C24.2 C23.2 v16.42,18.23 v16.41,18.24 | C4.2 v54.23,13.06 | C25.2 71.45,13.03 v71.48,13 | v69.85,27.3 v71.12,27.3 v71.12,26.04 v69.85,26.04 v68.58,26.04 | v68.58,18.41 v68.58,19.69 | IC2.29 v68.58,20.96 | IC2.29 v68.58,22.23 | IC2.29 v68.58,23.5 | IC2.29 v69.85,19.69 | v51.44,17.14 v51.44,18.41 | v52.7,20.96 v52.7,19.69 | v52.7,19.69 v51.44,18.41 | v52.7,23.5 v52.7,24.77 | v52.7,24.77 v51.44,26.04 v51.44,24.77 | v52.7,23.5 v53.98,24.77 | IC1.29 v52.7,23.5 | IC1.29 v52.7,20.96 | IC1.29 v52.7,19.69 | C46.2 v27.46,40.16 | IC2.19 71.47,20.6 v71.12,20.96
  Top 0.508: M1.2 70.7,44.52 R9.1 70.7,40.91 v70.71,40.89 | PCA9533.4 v11.86,35.59
  Top 0.61: v69.85,26.04 v69.85,24.77 | v69.85,19.69 v69.85,18.41 v69.85,17.14 | LED1.1 34.92,3.81 34.04,2.92 5V_CONV.OUT- | v21.59,30.43 v21.59,32.08 21.59,32.51 21.08,33.02 v20.52,33.02 19.25,33.02 v18.97,32.74 v17.83,32.74 v16.64,32.74 16.59,32.69 v15.47,32.69 v15.47,31.09 15.49,31.06 v15.49,30.07 v15.49,28.88 v15.49,27.56 15.49,26.29 v15.54,26.24 15.57,26.26 v17.02,26.26 v18.11,26.26 v19.18,26.26 19.66,25.78 v20.32,25.78 20.89,25.78 v21.6,26.49 21.6,27.52 v21.59,27.53 21.59,28.53 v21.61,28.55 v23.04,28.55
  Top 0.813: M3.2 73.34,5.61 R11.1 v74.55,6.18 v74.55,6.2
  other vias: 53.98,20.96 53.98,22.23 52.7,22.23 53.98,23.5 71.12,24.77 71.12,23.5 69.85,23.5 71.12,22.23 69.85,22.23 69.85,20.96 71.12,19.69
  cutout Top: 64.92,38.35 64.92,33.27 arc90 65.56,32.64 70.64,32.64 arc90 71.27,33.27 71.27,38.35 arc90 70.64,38.99 65.56,38.99 arc90
  cutout Bottom: 70,38.99 65.56,38.99 arc90 64.92,38.35 64.92,33.27 arc90 65.56,32.64 70,32.64 arc90 71.27,33.27 71.27,38.35 arc90
I2C1_SCL  (2 unrouted)
  Top 0.254: 46.62,41.43 63.86,41.43 66.85,38.43 67.14,38.43 67.5,38.08 U3.23 | R1.2 46.62,41.43 | 46.62,41.43 41.42,41.43 40.18,40.19 40.18,37.34 36.32,33.48 31.94,33.48 30.39,35.03 U1.92
I2C1_SDA  (2 unrouted)
  Top 0.254: U3.24 67.1,37.83 66.95,37.97 66.66,37.97 63.67,40.97 53.47,40.97 51.74,39.24 48.11,39.24 | 48.46,38.89 48.11,39.24 | 48.11,39.24 45.43,39.24 R2.2 43.7,40.97 41.6,40.97 40.64,40.01 40.64,37.11 39.22,35.69 39.2,35.69 39.01,35.5 39.01,35.47 36.55,33.02 31.75,33.02 29.89,34.88 U1.93
I2C3_SCL
  Top 0.305: U1.67 45.43,31.21 47.75,33.53 48.32,33.53 R4.2
  Top 0.406: R4.2 49.53,34.76 I2C.1
I2C3_SDA
  Top 0.305: U1.66 45.67,30.71 47.98,33.02 50.36,33.02 R10.2
  Top 0.406: R10.2 52.08,37.45 I2C.2
LIDAR_POS_INT  (1 unrouted)
M_LB_IN1  (via drill 0.35)  (1 unrouted)
  Top 0.406: IC1.23 v58.13,23.2 v58.14,23.19
M_LB_IN2  (via drill 0.35)  (1 unrouted)
  Top 0.406: IC1.21 57.08,21.9 v57.48,21.49
M_LF_IN1  (via drill 0.35)  (1 unrouted)
  Top 0.406: IC1.27 55.66,25.82 56.55,25.82 56.82,26.09 v56.82,27.58
M_LF_IN2  (via drill 0.35)  (1 unrouted)
  Top 0.406: IC1.25 57.21,24.5 v57.81,25.1
M_PWM_LB  (via drill 0.2 pad 0.55)  (1 unrouted)
  Top 0.406: IC1.22 57.53,22.55 58.27,21.82 58.27,21.17 v58.27,20.62 57.16,20.62 56.55,21.23 55.66,21.23 IC1.20
M_PWM_LF  (via drill 0.2 pad 0.55)  (1 unrouted)
  Top 0.406: 58.59,26.13 v58.6,26.11 | 58.59,26.13 58.59,24.77 57.67,23.85 IC1.24 | IC1.26 55.66,25.17 56.76,25.17 57.72,26.13 58.59,26.13
M_PWM_RB  (via drill 0.2 pad 0.55)  (1 unrouted)
  Top 0.406: IC2.20 72.81,21.23 73.73,21.23 74.28,20.68 v75.41,20.68 75.41,21.87 74.73,22.55 IC2.22
M_PWM_RF  (via drill 0.2 pad 0.55)  (1 unrouted)
  Top 0.406: IC2.26 73.93,25.15 74.48,25.7 v75.59,25.7 75.62,25.68 75.62,24.62 74.84,23.85 IC2.24
M_RB_IN1  (via drill 0.35)  (1 unrouted)
  Top 0.406: IC2.23 75.48,23.2 v75.49,23.19
M_RB_IN2  (via drill 0.35)  (1 unrouted)
  Top 0.406: IC2.21 74.21,21.9 v74.62,21.49
M_RF_IN1  (via drill 0.35)  (1 unrouted)
  Top 0.406: IC2.27 73.71,25.8 74.09,26.18 v74.09,27.3
M_RF_IN2  (via drill 0.35)  (1 unrouted)
  Top 0.406: IC2.25 74.39,24.5 v74.8,24.92
M_SLEEP  (via drill 0.35)  (2 unrouted)
  Top 0.305: U1.90 31.39,35.04 v31.95,34.47
  Top 0.406: IC2.17 72.81,19.28 73.99,19.28 v75.28,17.98 v75.29,17.98 | IC1.17 55.66,19.28 56.94,19.28 v58.01,18.21
N$1
  Top 0.406: 66.89,25.82 IC2.2 65.84,25.8 65.44,26.2 C21.2
N$2
  Top 0.406: IC2.1 67.89,26.45 68.06,26.63 68.06,27.53 C21.1
N$3
  Top 0.406: IC2.3 65.34,25.15 C22.1
N$4
  Top 0.406: IC2.10 65.43,20.6 65.43,15.13 P2.1
N$5
  Top 0.305: J1.3 89.25,35.02 87.76,35.02 86.89,35.89 | R12.1 86.74,36.28 86.74,36.04 86.89,35.89 | R18.2 86.89,35.85 86.89,35.89
N$6
  Top 0.813: R3.2 78.07,6.8 FRONTLIGHT.P1
N$7
  Top 0.61: R5.1 LED1.2
N$8
  Top 0.254: U3.10 68.3,32.86 C7.1
N$9
  Top 0.61: M3.3 74.47,9.36 75.87,7.95 75.87,5.28 76.36,4.79 FRONTLIGHT.P2
N$10
  Top 0.61: M3.1 71.37,7.09 71.37,5.55 R6.2 72.1,5.29 72.36,5.03 72.36,3.94 72.71,3.59 R11.2
N$11
  Top 0.406: IC2.5 64.65,23.85 64.49,23.85 62.87,22.23 62.87,18.41 61.59,17.14 61.04,17.14 P4.6
N$12
  Top 0.406: IC2.7 64.89,22.55 63.68,21.34 63.68,16.69 59.69,12.7 59.69,5.79 P4.1
N$13
  Top 0.254: ABM8G-25.000MHZ-18-D2Y-T3.1 19.23,28.01 19.23,28.35 20.11,28.35 C11.2 20.55,28.93 20.83,29.21 U1.13
  Top 0.406: ABM8G-25.000MHZ-18-D2Y-T3.1 18.91,27.66
N$14
  Top 0.406: IC1.5 47.98,23.85 46.35,22.23 46.35,18.14 42.11,13.89 P3.6
N$15
  Top 0.305: J1.1 87.6,33.62 86.92,32.94 86.92,31.01 86.59,30.68 D2.2
N$16
  Top 0.305: U1.94 29.39,39.1 R7.1
N$17
  Top 0.305: J1.4 87.92,35.58 87.25,36.25 87.25,37.88 R16.2
N$18
  Top 0.406: IC1.2 48.49,25.8 48.26,26.04 C2.2
N$19
  Top 0.406: IC2.8 65.41,21.9 | 65.41,21.9 65.36,21.9 | 65.41,21.9 64.29,20.78 64.29,16.44 62.87,15.01 62.87,7.7 P2.6
N$20
  Top 0.406: IC1.1 50.74,26.45 50.93,26.64 50.93,27.48 C2.1
N$21
  Top 0.406: IC1.3 48.13,25.15 C3.1
N$22
  Top 0.508: PCA9533.1 10.2,40.39 R26.1
N$23
  Top 0.508: PCA9533.2 10.99,39.13 R27.1
N$24
  Top 0.508: PCA9533.3 11.78,37.86 R28.1
N$25  (1 unrouted)
N$26
  Top 0.406: C25.1 71.45,17.48 71.97,18 IC2.15
N$27
  Top 0.406: IC1.7 47.65,22.55 47.22,22.12 47.22,17.37 42.55,12.7 42.55,5.71 40.72,3.89 P3.1
N$28
  Top 0.406: IC1.8 48.34,21.9 47.83,21.39 47.83,17.12 46.35,15.65 46.35,6.99 49.45,3.89 P1.6
N$29
  Top 0.406: IC1.15 54.68,18 54.23,17.55 C4.1
N$30
  Top 0.406: IC1.10 48.9,20.6 48.88,20.58 48.86,20.58 48.44,20.16 48.44,14.98 P1.1
N$31
  Top 0.508: RGB_LED.P4 7.33,39.22 R26.2
N$32  (4 unrouted)
N$33
  Top 0.508: R27.2 3.25,37.19 RGB_LED.P3
N$34
  Top 0.305: J1.2 87.4,34.27 R14.2
N$35
  Top 0.508: RGB_LED.P2 7.27,35.22 R28.2
N$36  (1 unrouted)
N$37
  Top 0.406: R22.2 13.22,46.02 11.68,46.02 M2.1 10.58,43.13 R13.2
N$38
  Top 0.508: M1.1 68.9,42.65 R9.2 R38.2
N$39
  Top 0.813: LIDAR_MOTOR.P1 74,45.52 D1.A 72.7,46.82 M1.3
N$40  (5 unrouted)
N$44
  Top 0.254: ABM8G-25.000MHZ-18-D2Y-T3.3 17.96,30.14 C12.2 20.98,29.71 U1.12
  Top 0.406: ABM8G-25.000MHZ-18-D2Y-T3.3
N$45
  Top 0.305: U1.73 44.81,34.21 C32.2
N$55
  Top 0.813: FAN.P2 6.5,46.01 D3.A M2.3
NFAULT  (via drill 0.35)  (2 unrouted)
  Top 0.305: U1.80 36.38,39.06 R20.1 v36.13,40.48 v36.12,40.49
  Top 0.406: IC2.18 74.43,19.95 v75.28,19.1 | IC1.18 57.38,19.95 v58.01,19.32
NRST  (via drill 0.2 pad 0.55)  (2 unrouted)
  Top 0.305: U1.14 v26.71,28.71 v26.72,28.7
PWM1  (1 unrouted)
PWM2  (1 unrouted)
PWM3  (1 unrouted)
PWM4  (1 unrouted)
PWM_FAN
  Top 0.305: R22.1 15.24,44.62 15.24,43.18 16.51,41.91 26.67,41.91 28.39,40.2 U1.96
PWM_LIDAR  (1 unrouted)
  Top 0.305: 65.72,41.91 R38.1 | U1.95 28.89,40.31
PWM_LIGHT  (1 unrouted)
SWCLK
  Top 0.305: U1.76 38.38,39.12 41.91,42.65 41.91,44.83 RPI_ZERO.20
SWDIO  (via drill 0.2 pad 0.55)  (1 unrouted)
  Top 0.305: U1.72 41.8,33.71 v42.22,33.38
TEMPERATURE  (2 unrouted)
UART3_RX
  Top 0.305: U1.56 41.5,25.71 48.25,32.46 54.79,32.46 55.7,33.38 64.14,33.38 64.95,32.56 65.05,32.46 67.11,30.4 73.34,30.4 78.06,25.68 78.06,25.4 LDIAR.P1
UART3_TX
  Top 0.305: U1.55 41.72,25.21 48.46,31.95 55,31.95 55.91,32.87 63.92,32.87 66.9,29.9 67.21,29.9 67.31,29.9 73.13,29.9 76.39,26.63 76.39,22.67 77.38,21.69 LDIAR.P2
UART4_RX
  Top 0.305: U1.79 36.88,38.03 37.47,38.61 37.47,41.35 37.06,41.76 27.86,41.76 26.75,42.88 26.75,44.86 RPI_ZERO.34
UART4_TX
  Top 0.305: RPI_ZERO.32 29.21,44.93 29.21,43.18 30.12,42.27 37.27,42.27 37.97,41.56 37.97,38.43 37.38,37.84 U1.78
USB_OTG_DM  (1 unrouted)
USB_OTG_DP  (1 unrouted)
USB_OTG_ID  (1 unrouted)
V+  (4 unrouted)
  Top 0.406: INA219.1 11.09,11.7 10.54,11.15 10.54,4.34 11.97,2.92 R17.2
(copper drawn outside any net)
  shapes: Top area x2

## Text on the board
tNames: + | - + | 5v I1 I2 GND
bNames: ζ2 Motherboard | 5v GND SDA SCL